# Altium PCB stm32 ultimate PCB.PcbDoc
Units mil, origin at the board's own origin, x right, y up, seen from the top; angles counter-clockwise.
Board outline 2030.03 x 1910.51 mil, 2 copper layers (Top Layer, Bottom Layer); 41 components, 59 nets, 181 pads, 28 vias.
Unrouted connection lines stored in the file: 13.
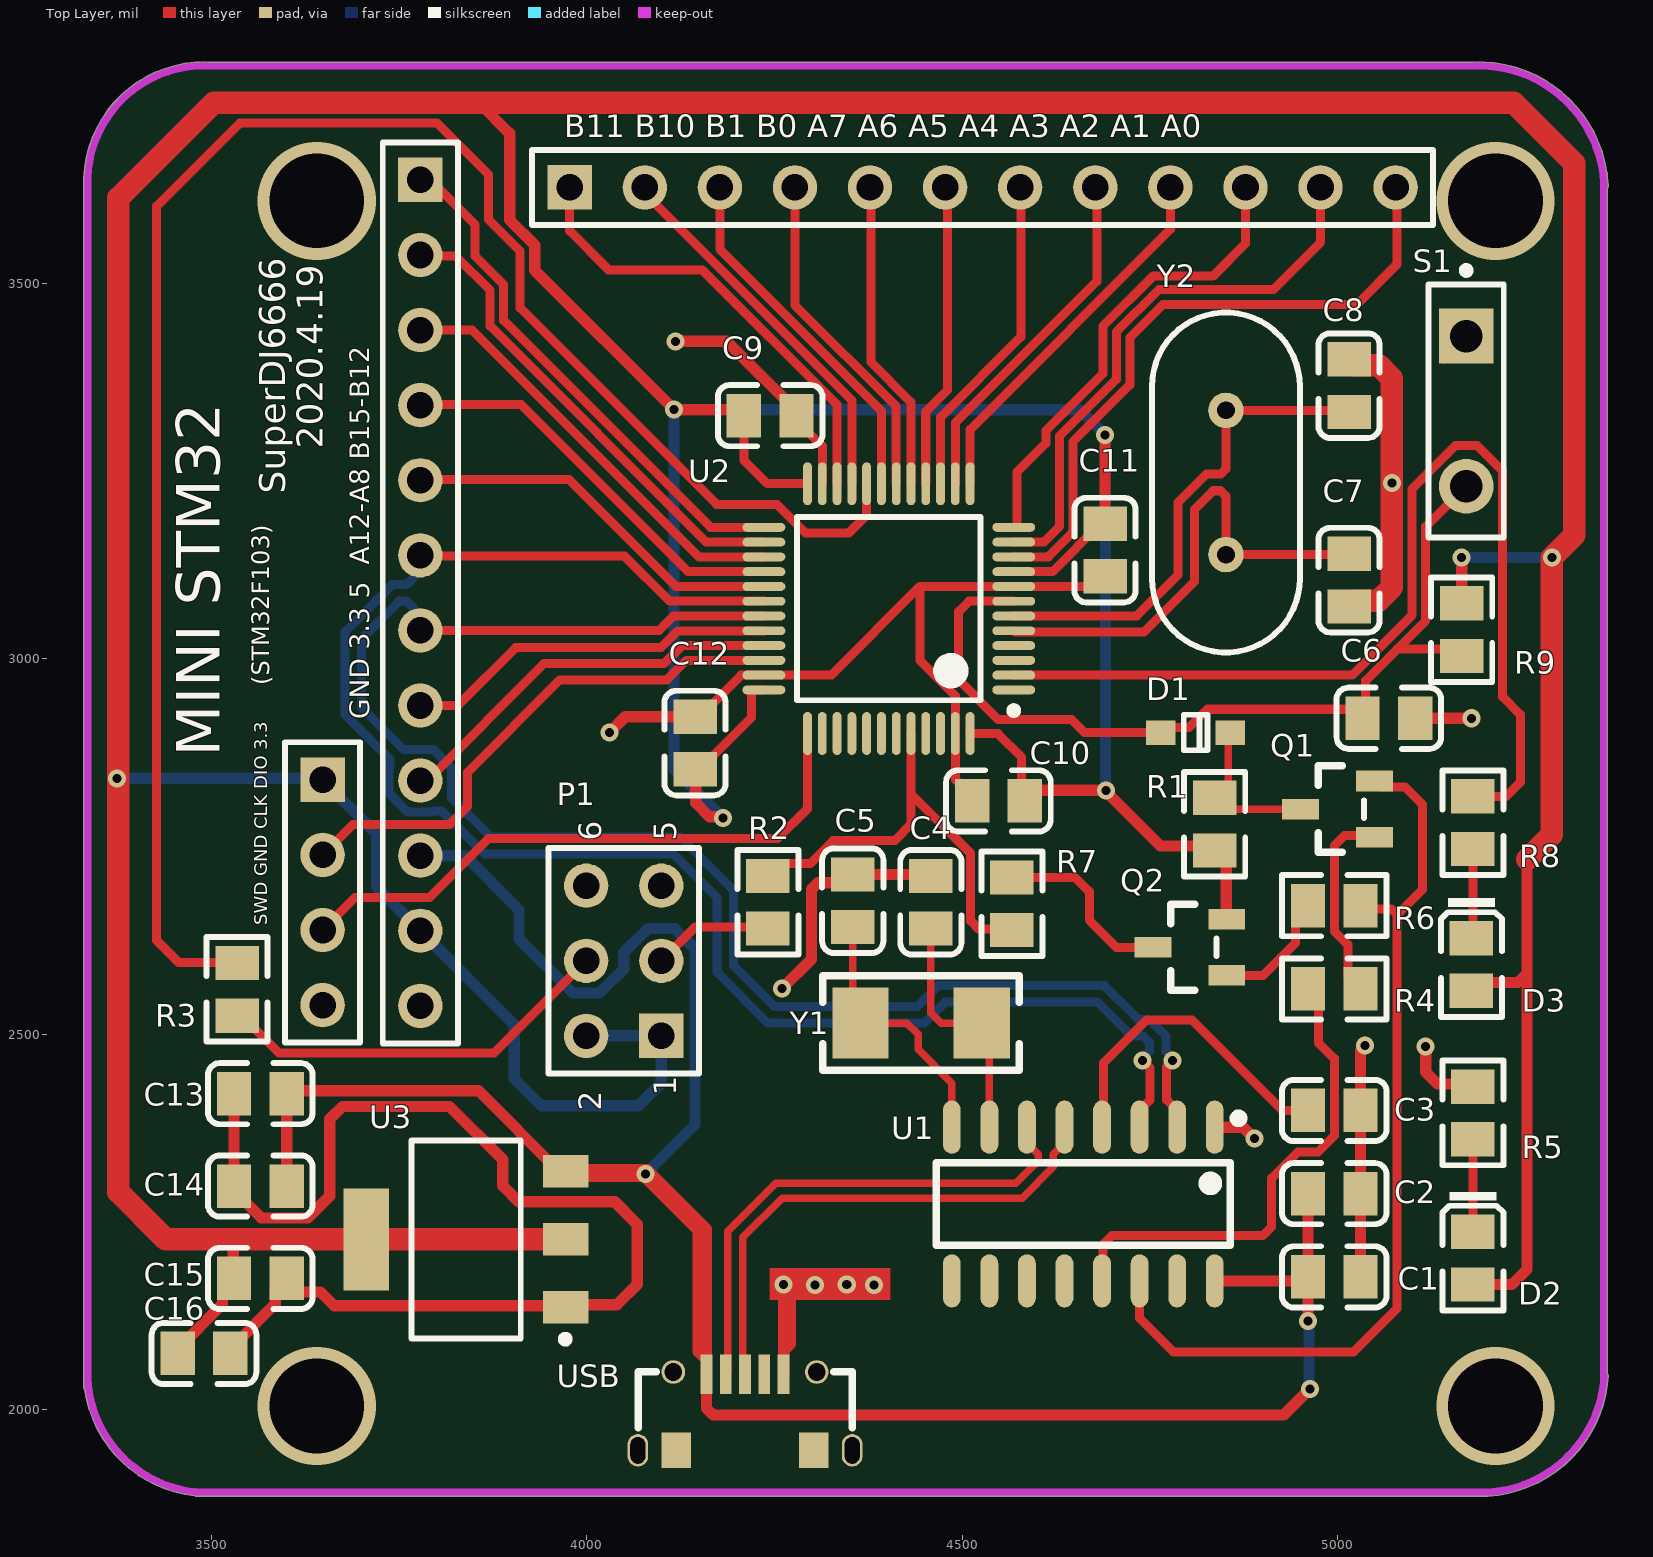
[diagram p0: Top Layer view]
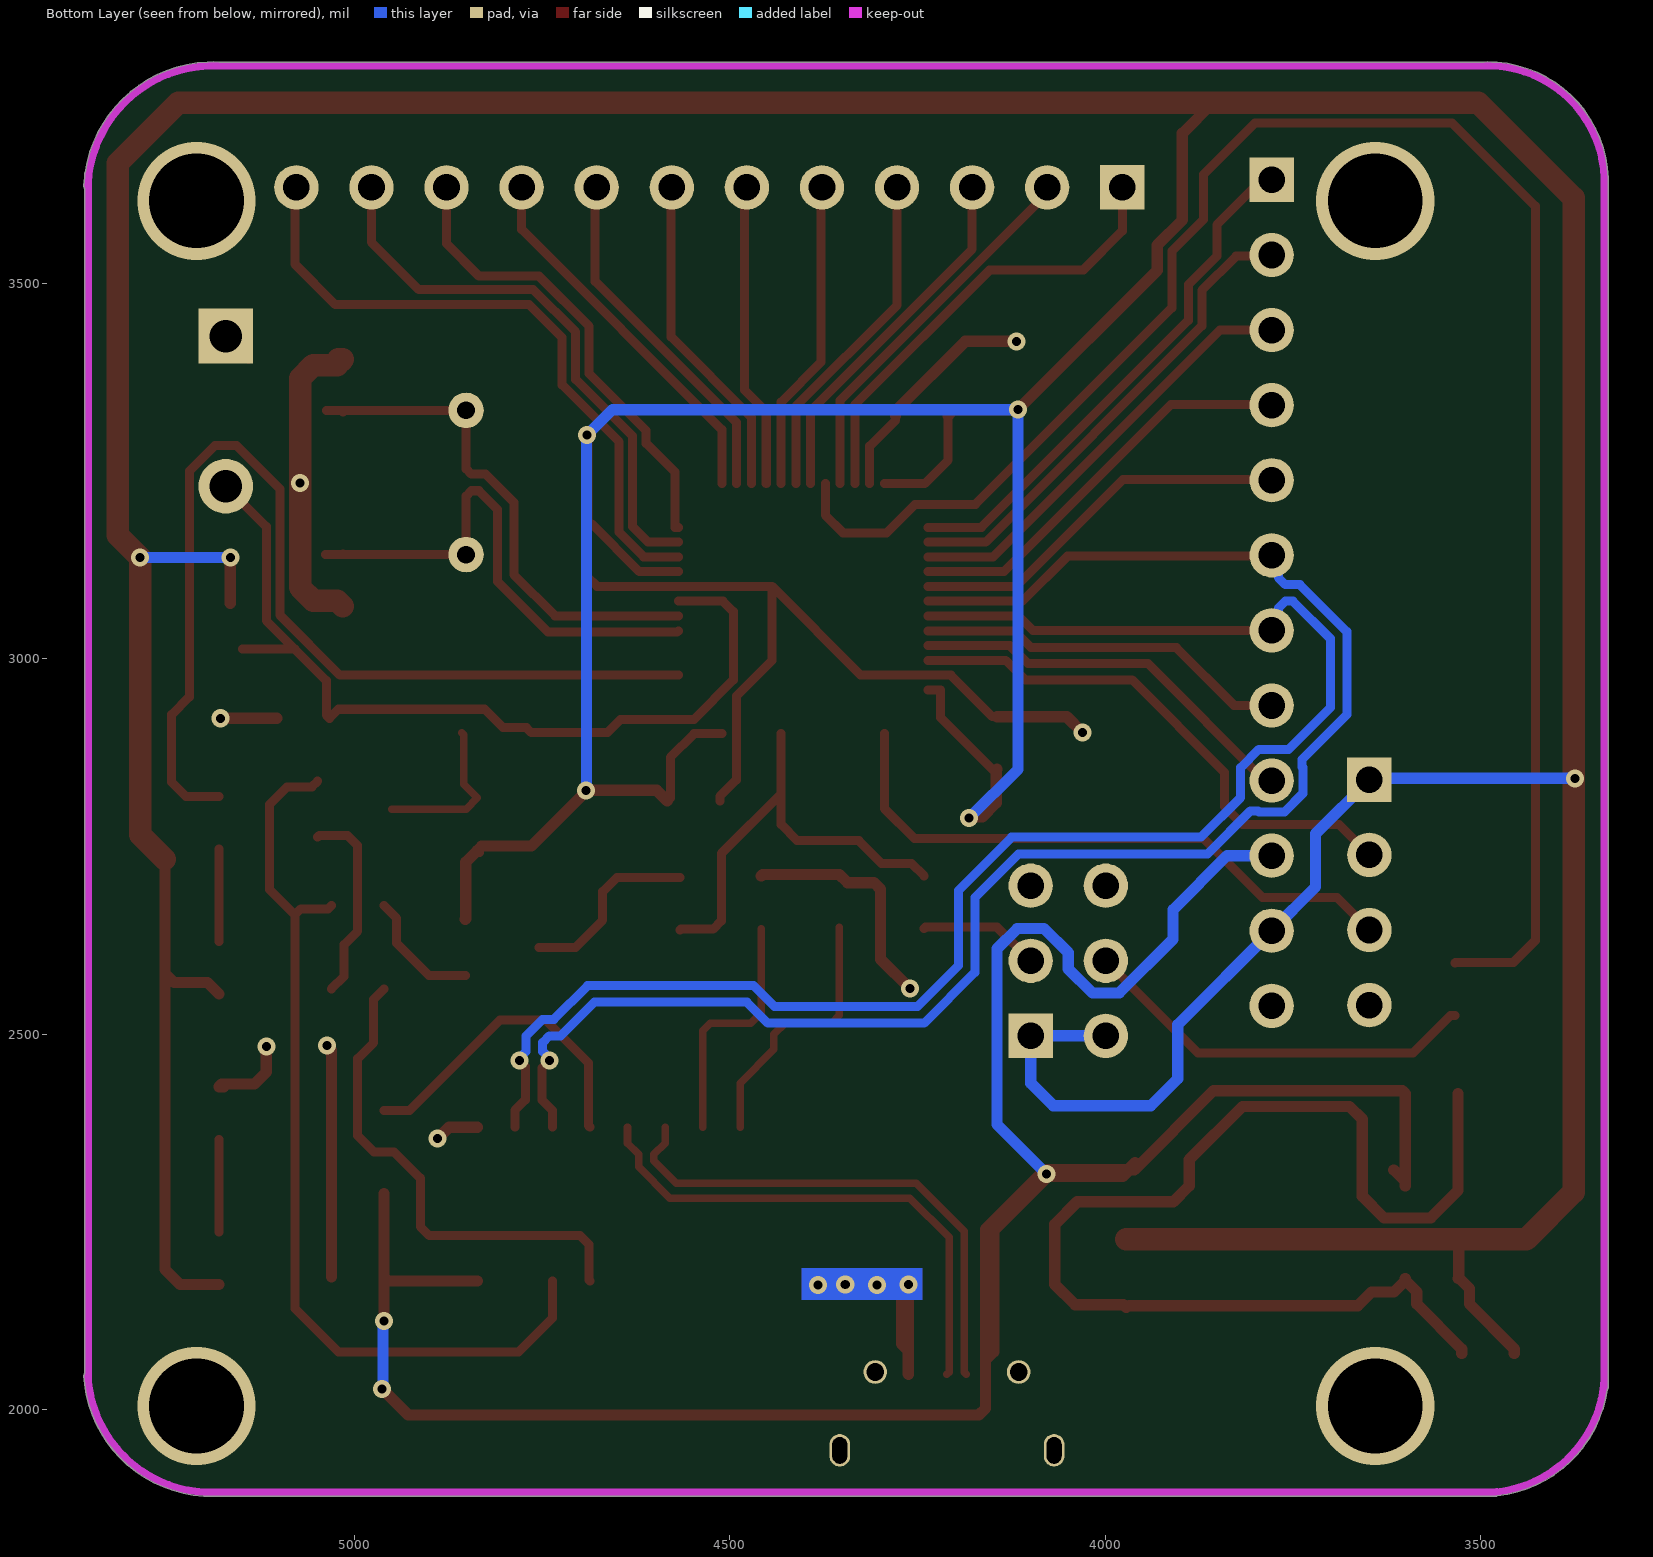
[diagram p1: Bottom Layer view, seen from below]
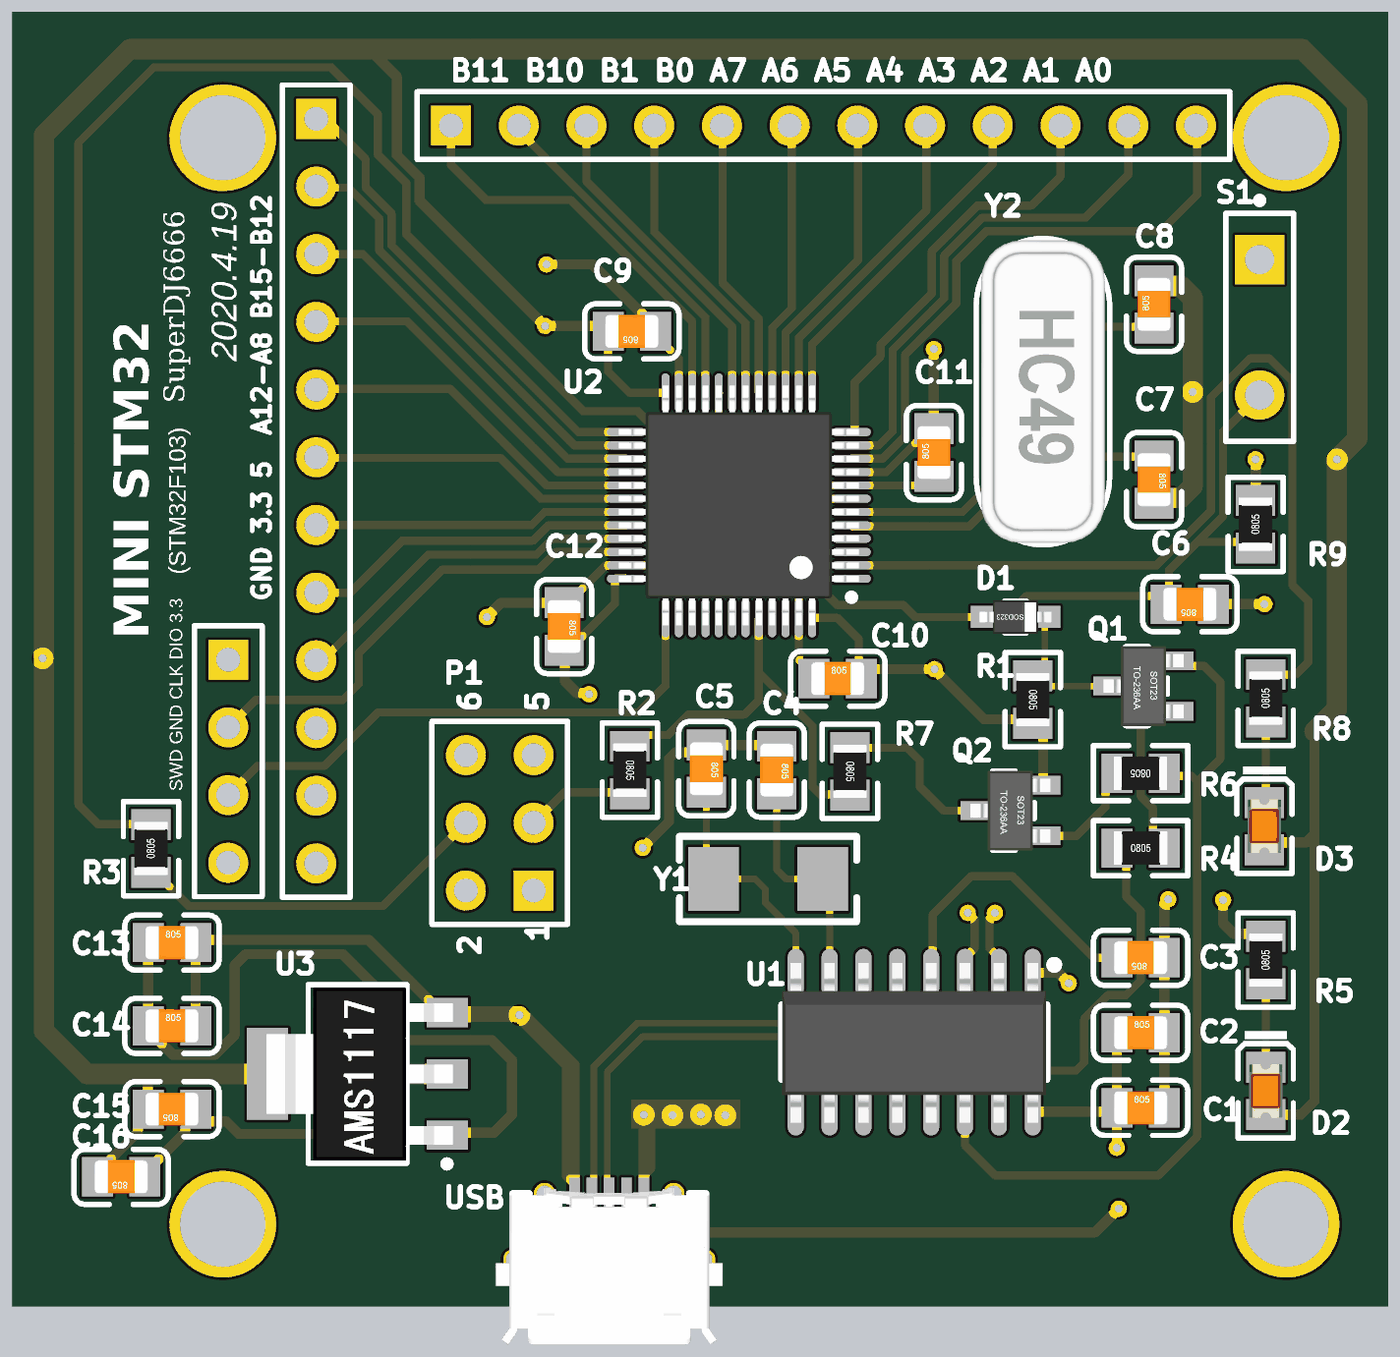
[diagram p2: 3D render of the assembled board from above, using the file's embedded part models]

## Layer stack, top to bottom
Top Solder: solder mask 0.4, Solder Resist, Dk 3.5
Top Layer: signal copper 1.4
Dielectric 1: dielectric 12.6, FR-4, Dk 4.8
Bottom Layer: signal copper 1.4
Bottom Solder: solder mask 0.4, Solder Resist, Dk 3.5

## Board outline
3477.61,1885.59 ccw(c3480,1890) 3480,1884.98 3484.85,1884.98 ccw(c3495,2050) 3505.15,1884.98 5179.85,1884.98 ccw(c5190,2055) 5200.27,1884.99 ccw(c5190,2055) 5200.34,1885 ccw(c5190,2055) 5359.04,2034.15 ccw(c5354.09,2035) 5359.1,2034.64 ccw(c5190,2055) 5360.01,2044.7 ccw(c5355,2045) 5360.02,2045 ccw(c5355,2045) 5359.11,2047.87 5359.11,3627.13 ccw(c5355,3630) 5360.02,3630 ccw(c5355,3630) 5360.01,3630.22 ccw(c5187.5,3622.5) 5359.11,3641.72 5359.11,3645 ccw(c5354.09,3645) 5358.34,3647.67 ccw(c5187.5,3622.5) 5195.22,3795.01 ccw(c5187.5,3622.5) 5179.89,3795.01 3495.08,3795.01 ccw(c3490,3635) 3484.92,3795.01 3480,3795.01 ccw(c3480,3790) 3478.14,3794.66 ccw(c3490,3635) 3329.99,3640.22 ccw(c3335,3640) 3329.98,3640 3329.98,2030 ccw(c3335,2030) 3331.34,2026.57 ccw(c3495,2050)

## Design rules (kind name [scope] priority, off if disabled: settings)
Clearance [All] p1: gap=6 ignorepadtopadclearanceinfootprint=FALSE
DiffPairsRouting [All] p1: maxlimit=10 minlimit=6 mostfreqgap=10 toplayer_minwidth=10 toplayer_maxwidth=15 toplayer_prefwidth=15 bottomlayer_minwidth=10 bottomlayer_maxwidth=15 bottomlayer_prefwidth=15 maxuncoupledlength=500
PolygonConnect [All] p1: connectstyle=Relief reliefconductorwidth=10 reliefentries=4 polygonreliefangle="90 Angle" airgapwidth=10
RoutingVias [All] p1: holewidth=28 width=50 viastyle="Through Hole" minholewidth=28 minwidth=50 maxholewidth=28 maxwidth=50
SolderMaskExpansion [All] p1: expansion=4
Width [All] p1: maxlimit=100 minlimit=1 preferedwidth=10 minimp=50.000000 maximp=50.000000 favimp=50.000000
29 further rules are at their usual default settings.

## Classes and differential pairs
differential pair 晶振差分: +OSCOUT -OSCIN
differential pair 串口差分: +PA9 -PA10

## Components (designator, comment, footprint, x,y, rotation, side; value= is the part's Value field where it differs from the comment)
"B11 B10 B1 B0 A7 A6 A5 A4 A3 A2 A1 A0" "Header 12" HDR1X12 3977,3628 r0 top (schematic designator P3)
C1 "100nF(104) 10% 50V" 0805_C 4995.26,2177 r0 top
C2 "10uF (106) 10% 25V" 0805_C 4995.26,2287.84 r0 top
C3 "100nF(104) 10% 50V" 0805_C 4995.26,2398.68 r180 top
C4 "22pF (220) 5% 50V" 0805_C 4458,2676 r270 top
C5 "22pF (220) 5% 50V" 0805_C 4354,2678 r270 top
C6 "1uF (105) 10% 50V" 0805_C 5068,2921 r180 top
C7 "22pF (220) 5% 50V" 0805_C 5015,3105 r270 top
C8 "22pF (220) 5% 50V" 0805_C 5015,3364 r90 top
C9 "100nF(104) 10% 50V" 0805_C 4244,3324 r180 top
C10 "100nF(104) 10% 50V" 0805_C 4548,2811 r0 top
C11 "100nF(104) 10% 50V" 0805_C 4690,3145 r90 top
C12 "100nF(104) 10% 50V" 0805_C 4144,2888 r270 top
C13 "10uF (106) 10% 25V" 0805_C 3565,2421 r0 top
C14 "100nF(104) 10% 50V" 0805_C 3565,2298 r0 top
C15 "100nF(104) 10% 50V" 0805_C 3565,2175 r180 top
C16 "10uF (106) 10% 25V" 0805_C 3490,2075 r180 top
D1 "1N4148WS T4" SOD-323 4810.54,2902 r180 top
D2 "红灯 0805" 0805_LED_S1 5180,2202 r270 top
D3 "红灯 0805" 0805_LED_S1 5178,2593 r270 top
"GND 3.3 5  A12-A8 B15-B12" "Header 12" HDR1X12 3778,3638 r270 top (schematic designator P2)
P1 "Header 3X2" HDR2X3 4099,2498 r90 top
Q1 "SS8050 Y1" SOT-23(SOT-23-3) 4999.46,2800 r0 top
Q2 "SS8550 Y2" SOT-23(SOT-23-3) 4802.87,2616 r0 top
R1 "10KΩ (1002) ±1%" 0805_R 4836,2780 r270 top
R2 "1KΩ (1001) ±1%" 0805_R 4241,2676 r270 top
R3 "1KΩ (1001) ±1%" 0805_R 3534,2560 r90 top
R4 "1KΩ (1001) ±1%" 0805_R 4995.26,2560.52 r0 top
R5 "1KΩ (1001) ±1%" 0805_R 5180,2395.33 r90 top
R6 "1KΩ (1001) ±1%" 0805_R 4995.26,2671.36 r180 top
R7 "1KΩ (1001) ±1%" 0805_R 4566,2674 r270 top
R8 "1KΩ (1001) ±1%" 0805_R 5180,2782 r90 top
R9 "10KΩ (1002) ±1%" 0805_R 5165,3039 r90 top
S1 "SW-PB" SPST-2 5171,3330 r270 top
"SWD GND CLK DIO 3.3" "SWD" HDR1X4 3648,2839 r270 top (schematic designator P4)
U1 "CH340G" SOIC-16_150mil 4661,2274 r180 top
U2 "STM32F103C" LQFP-48N 4402,3067 r180 top
U3 "AMS1117" AMS1117 3839,2227 r90 top
USB "micro usb" "micro usb" 4210.54,2047.38 r180 top (schematic designator J1)
Y1 "12MHz ±20ppm 20pF" SMD-5032_2P 4445,2515 r180 top
Y2 "8MH" XTAL 4851,3235 r270 top

## Footprints (in the part's own frame and the unit in brackets; to place one, negate y for a bottom-side part, rotate by r counter-clockwise, add the part's x,y. Pads: shape width x height; smd on the part's side, far side on the other; paste and mask are expansions set on the pad)
0805_C [mm]
  rect 1.16x1.47 smd: 1(-0.89,0) 2(0.89,0)
  silkscreen extent -1.77,-1.04 1.77,1.04, body extent -1,-0.62 1,0.63, height 0.77
0805_LED_S1 [mm]
  rect 1.16x1.47 smd: A(0.89,0) K(-0.89,0)
  silkscreen extent -2.25,-1.04 1.77,1.03, body extent -1.01,-0.62 1.01,0.62, height 1.1
0805_R [mm]
  rect 1.16x1.47 smd: 1(-0.89,0) 2(0.89,0)
  silkscreen extent -1.77,-1.04 1.77,1.03, body extent -1,-0.62 1,0.63, height 0.49
AMS1117 [mm]
  rect 1.1x1.55 smd: 1(-2.3,-3.375) 2(0,-3.375) 3(2.3,-3.375)
  rect 3.45x1.55 smd: 4(0,3.375)
  silkscreen extent -3.5,-3.48 3.35,1.85, body extent -3.25,-3.58 3.25,3.42, height 1.85
HDR1X4 [mm] "Connector; Header; 4 Position"
  rect 1.5x1.5 hole 0.9: 1(0,0)
  round 1.5 hole 0.9: 2(2.54,0) 3(5.08,0) 4(7.62,0)
  silkscreen extent -1.27,-1.27 8.89,1.27
HDR1X12 [mm] "Connector; Header; 12 Position"
  rect 1.5x1.5 hole 0.9: 1(0,0)
  round 1.5 hole 0.9: 2(2.54,0) 3(5.08,0) 4(7.62,0) 5(10.16,0) 6(12.7,0) 7(15.24,0) 8(17.78,0) 9(20.32,0) 10(22.86,0) 11(25.4,0) 12(27.94,0)
  silkscreen extent -1.27,-1.27 29.21,1.27
HDR2X3 [mm] "Connector; Header; 3x2 Position"
  rect 1.5x1.5 hole 0.9: 1(0,0)
  round 1.5 hole 0.9: 2(0,2.54) 3(2.54,0) 4(2.54,2.54) 5(5.08,0) 6(5.08,2.54)
  silkscreen extent -1.27,-1.27 6.35,3.81
LQFP-48N [mm] "LQFP, 48-Leads, Body 7.00x7.00mm, Pitch 0.50mm, IPC Medium Density"
  oval 1.45x0.3 smd: 1(-4.225,2.75) 2(-4.225,2.25) 3(-4.225,1.75) 4(-4.225,1.25) 5(-4.225,0.75) 6(-4.225,0.25) 7(-4.225,-0.25) 8(-4.225,-0.75) 9(-4.225,-1.25) 10(-4.225,-1.75) 11(-4.225,-2.25) 12(-4.225,-2.75) 25(4.225,-2.75) 26(4.225,-2.25) 27(4.225,-1.75) 28(4.225,-1.25) 29(4.225,-0.75) 30(4.225,-0.25) 31(4.225,0.25) 32(4.225,0.75) 33(4.225,1.25) 34(4.225,1.75) 35(4.225,2.25) 36(4.225,2.75)
  oval 0.3x1.45 smd: 13(-2.75,-4.225) 14(-2.25,-4.225) 15(-1.75,-4.225) 16(-1.25,-4.225) 17(-0.75,-4.225) 18(-0.25,-4.225) 19(0.25,-4.225) 20(0.75,-4.225) 21(1.25,-4.225) 22(1.75,-4.225) 23(2.25,-4.225) 24(2.75,-4.225) 37(2.75,4.225) 38(2.25,4.225) 39(1.75,4.225) 40(1.25,4.225) 41(0.75,4.225) 42(0.25,4.225) 43(-0.25,4.225) 44(-0.75,4.225) 45(-1.25,4.225) 46(-1.75,4.225) 47(-2.25,4.225) 48(-2.75,4.225)
  silkscreen extent -4.35,-3.1 3.1,3.57, body extent -4.5,-4.5 4.5,4.5, height 1.6
"micro usb" [mm]
  rect 0.4x1.35 smd: 1(1.3,0) 2(0.65,0) 3(0,0) 4(-0.65,0) 5(-1.3,0)
  oval 0.7x1.1 hole 0.5 slot 0.9 at 90 deg: ""(-3.625,2.575) ""(3.625,2.575)
  round 0.8 hole 0.6: ""(-2.425,-0.075) ""(2.425,-0.075)
  rect 1x1.2 smd: ""(-2.325,2.575) ""(2.325,2.575)
  silkscreen extent -3.62,-0.07 3.61,1.81, body extent -4.32,-0.31 4.33,5.59, height 2.78
SMD-5032_2P [mm]
  rect 1.9x2.4 smd: 1(-2.05,0) 2(2.05,0)
  silkscreen extent -3.32,-1.6 3.32,1.6
SOD-323 [mm]
  rect 1x0.83 smd: 1(1.18,0) 2(-1.18,0)
  silkscreen extent -0.4,-0.6 0.4,0.6, body extent -1.35,-0.62 1.35,0.63, height 1.1
SOIC-16_150mil [mm]
  oval 0.6x1.8 smd: 1(-4.445,-2.6) 2(-3.175,-2.6) 3(-1.905,-2.6) 4(-0.635,-2.6) 5(0.635,-2.6) 6(1.905,-2.6) 7(3.175,-2.6) 8(4.445,-2.6) 9(4.445,2.6) 10(3.175,2.6) 11(1.905,2.6) 12(0.635,2.6) 13(-0.635,2.6) 14(-1.905,2.6) 15(-3.175,2.6) 16(-4.445,2.6)
  silkscreen extent -5.4,-3.05 4.97,1.4, body extent -4.95,-2.97 4.95,3.03, height 1.75
SOT-23(SOT-23-3) [mm]
  rect 1.25x0.7 smd: 1(1.25,-0.95) 2(1.25,0.95) 3(-1.25,0)
  silkscreen extent -0.65,-1.46 0.9,1.46, body extent -1.5,-1.5 1.5,1.5, height 1.3
SPST-2 [mm] "Switch; 2 Leads"
  rect 1.85x1.85 hole 1.1: 1(-2.54,0)
  round 1.85 hole 1.1: 2(2.54,0)
  silkscreen extent -4.89,-1.27 4.28,1.27
XTAL [mm] "晶振"
  round 1.2 hole 0.6: 1(-2.44,0) 2(2.44,0)
  silkscreen extent -5.75,-2.5 5.75,2.5, body extent -5.67,-2.32 5.68,2.33, height 3.6

## Part data
"B11 B10 B1 B0 A7 A6 A5 A4 A3 A2 A1 A0" "GND 3.3 5  A12-A8 B15-B12": "Header, 12-Pin", LatestRevisionDate=17-Jul-2002, LatestRevisionNote="Re-released for DXP Platform.", Publisher="Altium Limited"
C1 C3 C9 C10 C11 C12 C14 C15: library part "0805 100nF(104) 10% 50V", "贴片电容", Package=0805, SuppliersPartNumber=C49678, ComponentLink1Description=供?, ComponentLink1URL=http://www.szlcsc.com/product/details_50686.html, Supplier=LC
C2 C13 C16: library part "0805 10uF (106) 10% 25V", "贴片电容", Package=0805, SuppliersPartNumber=C15850, ComponentLink1Description=供?, ComponentLink1URL=http://www.szlcsc.com/product/details_16532.html, Supplier=LC
C4 C5 C7 C8: library part "0805 22pF (220) 5% 50V", "贴片电容", Package=0805, SuppliersPartNumber=C1804, ComponentLink1Description=供?, ComponentLink1URL=http://www.szlcsc.com/product/details_2156.html, Supplier=LC
C6: library part "0805 1uF (105) 10% 50V", "贴片电容", Package=0805, SuppliersPartNumber=C28323, ComponentLink1Description=供?, ComponentLink1URL=http://www.szlcsc.com/product/details_29074.html, Supplier=LC
D1: library part "SOD-323 1N4148WS T4", "二极管", Package=SOD-323, SuppliersPartNumber=C2128, ComponentLink1Description=供?, ComponentLink1URL=http://www.szlcsc.com/product/details_2485.html, Supplier=LC
D2 D3: library part "0805 红灯", "发光二极管", Package=0805, SuppliersPartNumber=C2295, ComponentLink1Description=供?, ComponentLink1URL=http://www.szlcsc.com/product/details_2668.html, Supplier=LC
P1: "Header, 3-Pin, Dual row", LatestRevisionDate=17-Jul-2002, LatestRevisionNote="Re-released for DXP Platform.", Publisher="Altium Limited"
Q1: library part "SOT-23 SS8050 Y1", "三极管", Package=SOT-23, SuppliersPartNumber=C2150, ComponentLink1Description=供?, ComponentLink1URL=http://www.szlcsc.com/product/details_2507.html, Supplier=LC
Q2: library part "SOT-23 SS8550 Y2", "三极管", Package=SOT-23, SuppliersPartNumber=C8542, ComponentLink1Description=供?, ComponentLink1URL=http://www.szlcsc.com/product/details_9037.html, Supplier=LC
R1 R9: library part "0805 10KΩ (1002) 1%", "贴片电阻", Package=0805, SuppliersPartNumber=C17414, ComponentLink1Description=供?, ComponentLink1URL=http://www.szlcsc.com/product/details_18102.html, Supplier=LC
R2 R3 R4 R5 R6 R7 R8: library part "0805 1KΩ (1001) 1%", "贴片电阻", Package=0805, SuppliersPartNumber=C17513, ComponentLink1Description=供?, ComponentLink1URL=http://www.szlcsc.com/product/details_18201.html, Supplier=LC
S1: "Switch", LatestRevisionDate=17-Jul-2002, LatestRevisionNote="Re-released for DXP Platform.", PackageDescription="Switch; 2 Leads", PackageReference=SPST-2, Published=24-Mar-1999, Publisher="Altium Limited"
"SWD GND CLK DIO 3.3": library part "Header 4", "Header, 4-Pin", LatestRevisionDate=17-Jul-2002, LatestRevisionNote="Re-released for DXP Platform.", Publisher="Altium Limited"
U1: library part CH340G_[C14267], "USB", Package=SOIC-16_150mil, SuppliersPartNumber=C14267, ComponentLink1Description=供?, ComponentLink1URL=http://www.szlcsc.com/product/details_14927.html, Supplier=LC
U2: "Low-density performance line, ARM-based 32-bit MCU with 16 or  32 KB Flash, USB, CAN, 6 timers, 2 ADCs, 6 com. interfaces"
Y1: library part "SMD-5032_2P 8MHz 20ppm 20pF", "贴片晶振", Package=SMD-5032_2P, SuppliersPartNumber=C115962, ComponentLink1Description=供?, ComponentLink1URL=http://www.szlcsc.com/product/details_117214.html, Supplier=LC
Y2: library part XTAL, "XTAL"

## Via types
v1: diameter 24/24 (per signal layer), hole 12, Top Layer to Bottom Layer, 24 vias
v2: diameter 157.48, hole 125.98, Top Layer to Bottom Layer, 4 vias

## Nets (pads, with @x,y where several pads share a name; then routed paths per layer and width w, separated by ;. In a path a pad name is that pad's centre, name@x,y a point inside that pad or via, vN(x,y) a via of type N, cw(c..) or ccw(c..) an arc to the next point about the centre after c; other vN are vias at no path point)
BOOT0: R2.1 R7.2 U2.44 | length 602.3
  Top Layer w12: R2.1 4257.83,2727.87 4297.87,2727.87 4328,2758 4410,2758 4431.53,2779.53 4431.53,2820.34 ; U2.44 4431.53,2820.34 ; R7.2 4564.96,2640 4522,2640 4511,2651 4511,2740.87 4431.53,2820.34
BOOT1: R3.2 U2.20 | length 2445.9
  Top Layer w12: R3.2 3533.04,2596 3456,2596 3427,2625 3427,3603 3538,3714 3800,3714 3869,3645 3869,3585 3911,3543 3911,3467.59 4172.59,3206 4252.89,3206 4290.89,3168 4349,3168 4372.38,3191.38 4372.38,3233.24 U2.20
"CH340 D+": U1.5 USB.3 | length 694.7
  Top Layer w10: USB.3 4207.74,2050.17 4207.74,2229.74 4260,2282 4579.5,2282 4621,2323.5 4621,2340.07 4636,2355.07 U1.5
"CH340 D-": U1.6 USB.2 | length 694.7
  Top Layer w10: USB.2 4187.74,2050.17 4187.74,2238.02 4251.72,2302 4571.21,2302 4601,2331.79 4601,2340.07 4586,2355.07 U1.6
GND: "GND 3.3 5  A12-A8 B15-B12.12" "SWD GND CLK DIO 3.3.4" C1.2 C2.2 C3.1 C4.1 C5.1 C6.1 C7.2 C8.2 C9.1 C10.1 C11.1 C12.1 P1.5 P1.6 R5.2 S1.1 U1.1 U2.8 U2.23 U2.35 U2.47 USB.5 | length 2957.9
  Top Layer w12: C12.1 4150.1,2923.04 4205.39,2978.32 4235.57,2978.32 U2.35 4325.42,2978.42 4443.53,3096.53 ; C9.1 4279.04,3317.9 4313.42,3283.52 U2.23 ; C10.1 4512.96,2817.1 4491,2839.06 4491,2846 4490.58,2846.42 U2.47 4490.58,2950.96 4443.53,2998.02 4443.53,3096.53 ; C11.1 4676.57,3096.53 U2.8 4443.53,3096.53 ; C8.2 C8.2@5015.54,3399.58 ; S1.1@5140.58,3399.58 S1.1
  Top Layer w15: v1(4030,2902) 4051.04,2923.04 C12.1 ; v1(4118,3423) 4186.14,3423 4279.04,3330.1 C9.1 ; v1(4260,2561) 4299,2600 4299,2693.21 4307.79,2702 4342.96,2702 C5.1 4456,2713.04 C4.1 ; v1@4262,2167 v1(4261.72,2166.72) ; U1.1 4873.64,2376.36 v1(4889,2361) ; C1.2 C3.1 5030.3,2479.3 v1(5036,2485) ; C6.1 v1(5178,2921) ; v1(5117,2484) 5117,2450 5133,2434 5176.37,2434 R5.2 R5.2@5173.9,2430.37 ; v1(4261.72,2166.72) 4271,2157.43 4271,2088 4262.09,2079.09 4262.09,2047.75 USB.5 v1(4261.72,2166.72)
  Top Layer w30: P1.6 P1.6@4000.5,2699.5 ; C7.2 5022.83,3077.8 5054.49,3077.8 5072.06,3095.37 5072.06,3373.63 5054.49,3391.2 5022.83,3391.2 C8.2 C8.2@5021.1,3399.04
  Bottom Layer w15: v1@4260,2168.43 v1(4261.72,2166.72)
  other v1: 4304,2166 4382,2166 4346,2167 5072.06,3234.5
NetC3_2: C3.2 U1.4 | length 432.1
  Top Layer w12: U1.4 4688.22,2378.59 4688.22,2462.16 4745.06,2519 4806,2519 4926.32,2398.68 C3.2
NetC4_2: C4.2 U1.7 Y1.1 | length 328.4
  Top Layer w10: C4.2 4458,2529 4472,2515 Y1.1 4536,2504.71 U1.7
NetC5_2: C5.2 U1.8 Y1.2 | length 357.4
  Top Layer w10: C5.2 4354,2525.29 Y1.2 4426,2515 4441,2500 4441,2480 4486,2435 U1.8
NetC13_1: C13.1 C14.1 C15.1 C16.1 U3.1 | length 1589.1
  Top Layer w15: C16.1 3525.04,2081.1 3584.7,2140.77 3584.7,2157 C15.1@3600.04,2172.33 ; C13.1 C14.1 3529.96,2291.9 3566.3,2255.56 3628.56,2255.56 3657.5,2284.5 3657.5,2387.21 3674.29,2404 3817,2404 3888,2333 3888,2298 3909,2277 4037,2277 4067,2247 4067,2167 4040,2140 3975.43,2140 U3.1 ; C15.1 C15.1@3600.04,2172.33 ; U3.1@3967.87,2138.45 3663.55,2138.45 3645,2157 3615.37,2157 C15.1@3600.04,2172.33
NetD1_2: D1.2 Q1.3 R1.1 | length 216.1
  Top Layer w10: D1.2 4853.83,2898.83 4853.83,2832.87 R1.1 4851.04,2800 Q1.3
NetD2_K: D2.K R5.1 | length 123.3
  Top Layer w12: D2.K R5.1
NetD3_K: D3.K R8.1 | length 123.3
  Top Layer w12: D3.K@5180,2623.71 R8.1
NetP1_3: P1.3 R2.2 | length 161.5
  Top Layer w12: P1.3 4144,2643 4238.96,2643 R2.2
NetP1_4: P1.4 R3.1 | length 536.6
  Top Layer w12: R3.1 3540.1,2524.96 3590.06,2475 3876,2475 P1.4
NetQ1_1: Q1.1 R4.2 | length 265.2
  Top Layer w12: R4.2 5013.46,2577.36 5013.46,2619.46 4995.46,2637.46 4995.46,2751.46 5009,2765 5046.27,2765 Q1.1
NetQ1_2: Q1.2 R6.1 U1.14 | length 1251.5
  Top Layer w12: U1.14 4736,2122 4781,2077 5021,2077 5079,2135 5079,2659 ; R6.1 5034.66,2667 5071,2667 5079,2659 ; Q1.2 5056.45,2829.62 5089.38,2829.62 5113,2806 5113,2693 5079,2659
NetQ2_1: Q2.1 R6.2 | length 166
  Top Layer w12: Q2.1 4900.6,2578.6 4943.39,2621.39 4943.39,2654.53 R6.2
NetQ2_3: Q2.3 R7.1 | length 248.5
  Top Layer w12: R7.1 4649.96,2709.04 4669,2690 4669,2652 4705,2616 Q2.3
NetR4_1: R4.1 U1.13 | length 665
  Top Layer w12: U1.13 4686.97,2172.61 4686.97,2219.97 4699,2232 4900,2232 4912,2244 4912,2308.36 4947.1,2343.47 4973.75,2343.47 4995.46,2365.18 4995.46,2467.54 4974,2489 4974,2546.74 R4.1
OSCIN: C7.1 U2.5 Y2.2 | length 687.1
  Top Layer w12: U2.5 4570.12,3035.69 4741.81,3035.69 4809.38,3103.27 4809.38,3199.35 4834.03,3224 4843.97,3224 4851,3216.97 Y2.2 C7.1@5013.9,3138.94 ; C7.1 C7.1@5013.9,3138.94 ; C7.1@5037.9,3138.94 C7.1@5013.9,3138.94
OSCOUT: C8.1 U2.6 Y2.1 | length 692.6
  Top Layer w12: U2.6 4568.43,3057.25 4732.25,3057.25 4787.38,3112.38 4787.38,3208.46 4824.92,3246 4843.97,3246 4851,3253.03 4851,3317.58 4844.26,3324.32 Y2.1 C8.1@5012.9,3331.06 ; C8.1 C8.1@5012.9,3331.06 ; C8.1@5036.9,3331.06 C8.1@5012.9,3331.06
PA0: "B11 B10 B1 B0 A7 A6 A5 A4 A3 A2 A1 A0.12" U2.10 | length 882.5
  Top Layer w12: U2.10 4568.43,3135.99 4614.39,3135.99 4647.23,3168.83 4647.23,3289.23 4723,3365 4723,3428 4767,3472 5025,3472 5079,3526 5079,3626 5077,3628
PA1: "B11 B10 B1 B0 A7 A6 A5 A4 A3 A2 A1 A0.11" U2.11 | length 754.5
  Top Layer w12: U2.11 4568.43,3155.68 4608.62,3155.68 4629.23,3176.29 4629.23,3296.69 4705,3372.46 4705,3435.46 4761.54,3492 4914,3492 4977,3555 4977,3628
PA2: "B11 B10 B1 B0 A7 A6 A5 A4 A3 A2 A1 A0.10" U2.12 | length 630.1
  Top Layer w12: U2.12 4572.91,3175.27 4573,3175.36 4573,3249 4611.23,3287.23 4611.23,3304.14 4687,3379.91 4687,3442.91 4754.09,3510 4834,3510 4877,3553 4877,3628
PA3: "B11 B10 B1 B0 A7 A6 A5 A4 A3 A2 A1 A0.9" U2.13 | length 505.1
  Top Layer w12: U2.13 4510.27,3305.27 4777,3572 4777,3628
PA4: "B11 B10 B1 B0 A7 A6 A5 A4 A3 A2 A1 A0.8" U2.14 | length 473.5
  Top Layer w12: U2.14 4490.58,3314.58 4679,3503 4679,3626 4677,3628
PA5: "B11 B10 B1 B0 A7 A6 A5 A4 A3 A2 A1 A0.7" U2.15 | length 439.4
  Top Layer w12: U2.15 4470.9,3321.9 4578,3429 4578,3627 4577,3628
PA6: "B11 B10 B1 B0 A7 A6 A5 A4 A3 A2 A1 A0.6" U2.16 | length 407.8
  Top Layer w12: U2.16 4451.21,3329.21 4480,3358 4480,3625 4477,3628
PA7: "B11 B10 B1 B0 A7 A6 A5 A4 A3 A2 A1 A0.5" U2.17 | length 417.2
  Top Layer w12: 4377,3628 4378,3627 4378,3395.6 4431.53,3342.08 U2.17
PA8: "GND 3.3 5  A12-A8 B15-B12.5" U2.29 | length 517.1
  Top Layer w12: 3778,3238 3779,3239 3976,3239 4118.47,3096.53 U2.29
PA9: "GND 3.3 5  A12-A8 B15-B12.6" U1.3 U2.30 | length 2236.8
  Top Layer w12: 3778,3138 3779,3137 4050,3137 4110.16,3076.84 U2.30 ; U1.3 4736,2398.82 4750,2412.82 4750,2455 v1(4740,2465)
  Bottom Layer w12: 3778,3138 3769,3129 3769,3108.27 3759.73,3099 3740.67,3099 3678,3036.33 3678,2925.89 3737.61,2866.28 3737.61,2856.34 3736.47,2855.2 3736.47,2820.8 3760.8,2796.47 3795.2,2796.47 3796.34,2797.61 3806.28,2797.61 3863.35,2740.53 4115.19,2740.53 4173.46,2682.26 4173.46,2582.48 4240.95,2515 4449.14,2515 4477.14,2543 4680,2543 4725,2498 4740,2498 4749,2489 4749,2477.25 4740,2468.25 v1(4740,2465)
PA10: "GND 3.3 5  A12-A8 B15-B12.7" U1.2 U2.31 | length 2176.2
  Top Layer w12: 3778,3038 4096,3038 4115.16,3057.16 U2.31 ; v1(4780,2465) 4772,2457 4772,2412.82 4786,2398.82 U1.2
  Bottom Layer w12: 3778,3038 3769,3047 3769,3067.73 3759.73,3077 3749.79,3077 3700,3027.21 3700,2935 3755.47,2879.53 3795.2,2879.53 3819.53,2855.2 3819.53,2815.47 3872.47,2762.53 4124.31,2762.53 4195.46,2691.38 4195.46,2591.59 4250.06,2537 4440.03,2537 4468.03,2565 4689.11,2565 4734.11,2520 4749.11,2520 4771,2498.11 4771,2477.25 4780,2468.25 v1(4780,2465)
PA11: "GND 3.3 5  A12-A8 B15-B12.8" U2.32 | length 498.9
  Top Layer w12: 3778,2938 3828,2938 3905,3015 4098.46,3015 4120.93,3037.47 U2.32
PA12: "GND 3.3 5  A12-A8 B15-B12.9" U2.33 | length 532.1
  Top Layer w12: 3778,2838 3787,2838 3943,2994 4102.91,2994 4126.7,3017.79 U2.33
PA15: U2.38
PB0: "B11 B10 B1 B0 A7 A6 A5 A4 A3 A2 A1 A0.4" U2.18 | length 450.5
  Top Layer w12: 4277,3628 4277,3471.15 4411.84,3336.31 U2.18
PB1: "B11 B10 B1 B0 A7 A6 A5 A4 A3 A2 A1 A0.3" U2.19 | length 483.8
  Top Layer w12: 4177,3628 4177,3545.69 4392.16,3330.54 U2.19
PB3: U2.39
PB4: U2.40
PB5: U2.41
PB6: U2.42
PB7: U2.43
PB8: U2.45
PB9: U2.46
PB10: "B11 B10 B1 B0 A7 A6 A5 A4 A3 A2 A1 A0.2" U2.21 | length 508.9
  Top Layer w12: 4077,3628 4077,3620.24 4352.79,3344.45 U2.21
PB11: "B11 B10 B1 B0 A7 A6 A5 A4 A3 A2 A1 A0.1" U2.22 | length 615.3
  Top Layer w12: 3977,3628 3977,3570 4029,3518 4153.78,3518 4333.1,3338.68 U2.22
PB12: "GND 3.3 5  A12-A8 B15-B12.1" U2.25 | length 701.5
  Top Layer w12: 3778,3638 3791,3638 3851,3578 3851,3536.46 3889,3498.46 3889,3451 4164.73,3175.27 U2.25
PB13: "GND 3.3 5  A12-A8 B15-B12.2" U2.26 | length 643.9
  Top Layer w12: 3778,3538 3779.53,3536.47 3825.53,3536.47 3871,3491 3871,3443.54 4158.96,3155.58 U2.26
PB14: "GND 3.3 5  A12-A8 B15-B12.3" U2.27 | length 582.8
  Top Layer w12: 3778,3438 3847,3438 4149.1,3135.9 U2.27
PB15: "GND 3.3 5  A12-A8 B15-B12.4" U2.28 | length 550.4
  Top Layer w12: 3778,3338 3779,3339 3912,3339 4134.79,3116.21 U2.28
PC13: R8.2 U2.2 | length 1384.8
  Top Layer w12: U2.2 5018.96,2978.42 5099.06,3058.52 5099.06,3226.54 5156.53,3284 5185.47,3284 5219.42,3250.06 5219.42,2949.42 5243,2925.83 5243,2836 5224.04,2817.04 R8.2
PC14: U2.3
PC15: U2.4
REAST: C6.2 D1.1 R9.1 S1.2 U2.7 | length 1191.1
  Top Layer w12: U2.7 4508.84,3076.84 4495,3063 4495,2972 4547.34,2919.66 4645.21,2919.66 4662.87,2902 D1.1 4770.64,2908.56 4801.77,2908.56 4826.22,2933 5020.96,2933 C6.2 5037,2925.04 5037,2971 5079,3013 ; R9.1@5149.04,3013 5079,3013 ; S1.2 5117.06,3176.06 5117.06,3051.06 5079,3013
SWCLK: "SWD GND CLK DIO 3.3.3" U2.37 | length 812.7
  Top Layer w12: 3648,2639 3691,2682 3790,2682 3869,2761 4254,2761 4293.73,2800.73 U2.37
SWDIO: "SWD GND CLK DIO 3.3.2" U2.34 | length 721.6
  Top Layer w12: 3648,2739 3688.53,2779.53 3817.03,2779.53 3841,2803.5 3841,2849 3964,2972 4106.37,2972 4132.47,2998.1 U2.34
VBAT: U2.1
VCC3.3: "GND 3.3 5  A12-A8 B15-B12.11" "SWD GND CLK DIO 3.3.1" C9.2 C10.2 C11.2 C12.2 C15.2 C16.2 D2.A D3.A P1.1 P1.2 Q2.2 R1.2 R9.2 U2.9 U2.24 U2.36 U2.48 U3.2 U3.4 | length 10614.6
  Top Layer w12: C12.2 4150.1,2852.96 4219.02,2921.88 4219.02,2958.64 4219.12,2958.73 U2.36 ; C9.2 4208.96,3264.72 4240.34,3233.34 U2.24 ; U2.48 4547.34,2900.66 4579,2869 4579,2815.04 C10.2 ; U2.9 4620.07,3116.21 4683.9,3180.04 C11.2 ; R1.2@4833.04,2742 R1.2
  Top Layer w15: C16.2 3454.96,2081.1 3514.63,2140.77 3514.63,2161.59 C15.2@3529,2175.96 ; 3529,2227 C15.2@3529,2175.96 ; C15.2 C15.2@3529,2175.96 ; 3856,3741 3897,3700 3897,3584.58 3930.5,3551.08 3930.5,3517.5 v1(4116,3332) 4200.96,3332 C9.2 ; C12.2 4145,2851.96 4145,2808 4163.28,2789.72 4179.28,2789.72 v1(4181,2788) ; C10.2 4597.04,2825 4690,2825 4764,2751 4829.96,2751 R1.2 4851.33,2729.63 4851.33,2654.15 Q2.2 ; C11.2 v1(4690,3298) ; R9.2 v1(5165,3135) ; D2.A 5231.96,2166.96 5252,2187 5252,2581 ; D3.A@5180,2553.63 5195.33,2568.96 5239.96,2568.96 5252,2581 ; 5252,2733 5252,2581
  Top Layer w30: U3.2 U3.4 3529,2227 3439,2227 3376,2290 3376,3614 3503,3741 3856,3741 5234,3741 5315,3660 5315,3165 v1(5285,3135) 5285,2766 5252,2733
  Bottom Layer w15: v1(3374,2841) 3646,2841 3648,2839 3719.8,2767.2 3719.8,2696.2 3778,2638 3903,2513 3903,2441 3939,2405 4069,2405 4099,2435 P1.1 P1.2 ; v1(4181,2788) 4116,2853 v1(4116,3332) 4656,3332 v1(4690,3298) 4690.5,3297.5 4690.5,2825.5 v1(4691,2825) ; v1(5165,3135) v1(5285,3135)
VCC5: "GND 3.3 5  A12-A8 B15-B12.10" C1.1 C2.1 C13.2 C14.2 U1.16 U3.3 USB.1 | length 3489.9
  Top Layer w15: C14.2 C14.2@3600.04,2304.1 ; C14.2@3615.37,2319.44 C14.2@3600.04,2304.1 ; U3.3@3960,2329.42 U3.3@3969.87,2319.55 ; U3.3 U3.3@3969.87,2319.55 ; U1.16 4954.86,2171.64 C1.1 ; v1(4960,2118) 4960.22,2118.22 C1.1 ; C2.1 C1.1 ; v1(4963,2028) 4928,1993 4168.14,1993 4159.35,2001.79 USB.1 USB.1@4159.35,2066.08 ; C14.2@3600.04,2304.1 C13.2 3604.04,2425 3855.57,2425 3961.02,2319.55 U3.3@3967.87,2319.55 ; U3.3@3967.87,2319.55 U3.3@3969.87,2319.55 ; U3.3@3967.87,2319.55 3967.76,2319.44 3976.2,2311 4076,2311 4148,2239 4148,2077.43 USB.1@4159.35,2066.08 ; U3.3@3969.87,2319.55 4080.45,2319.55 4159.35,2240.65 USB.1@4159.35,2066.08
  Bottom Layer w15: 3778,2738 3837.32,2738 3909.48,2665.85 3909.48,2626.67 3981.18,2554.97 4016.82,2554.97 4049,2587.15 4049,2608.85 4081.18,2641.03 4116.82,2641.03 4143.86,2613.99 4143.86,2379.86 v1(4078,2314) ; v1(4960,2118) 4961.5,2116.5 4961.5,2029.5 v1(4963,2028)
pads on no net: U1.9 U1.10 U1.11 U1.12 U1.15 USB. USB.4
copper on no net:
  other v2: 3640,2005 5210,2005 3640,3610 5210,3610

## Keep-outs
Keep-Out Layer:
  lines w10: 3335,2030 3335,3640 cw(c3490,3635) 3495,3790 ; 3335,2040 ccw(c3495,2050) 3505,1890 ; 3480,1890 5200,1890 ; 3480,3790 5195,3790 ; 5180,1890 ccw(c5190,2055) 5355,2045 ; 5180,3790 cw(c5187.5,3622.5) 5355,3630 ; 5354.09,2035 5354.09,3645

## Other copper
Top Layer:
  rectangle net GND: 4243,2146 4404,2189
Bottom Layer:
  rectangle net GND: 4243,2146 4404,2189

## Silkscreen, mask and mechanical layers (free items; w line width, h text height)
Top Overlay:
  text "2020.4.19" at 3660,3280 h60 r90
  text "SuperDJ6666" at 3610,3220 h60 r90
  text "(STM32F103)" at 3585,2965 h40 r90
  text "MINI STM32" at 3530,2870 h100 r90

## Text inside footprints (layer, text, board x,y; h text height)
P1: Top Overlay "6" at 4019,2758 h30 r90; Top Overlay "5" at 4119,2758 h30 r90; Top Overlay "2" at 4019,2398 h30 r90; Top Overlay "1" at 4119,2418 h30 r90